# Altium PCB FOC_Driver.PcbDoc (part 1 of 2)
Units mil, origin at the board's own origin, x right, y up, seen from the top; angles counter-clockwise.
Board outline 3543.31 x 2362.2 mil, 4 copper layers (Top Layer 1, Ground, Power, Bottom Layer 1), stack 23.756 mil thick; 79 components, 64 nets, 313 pads, 178 vias.
Unrouted connection lines stored in the file: 65.
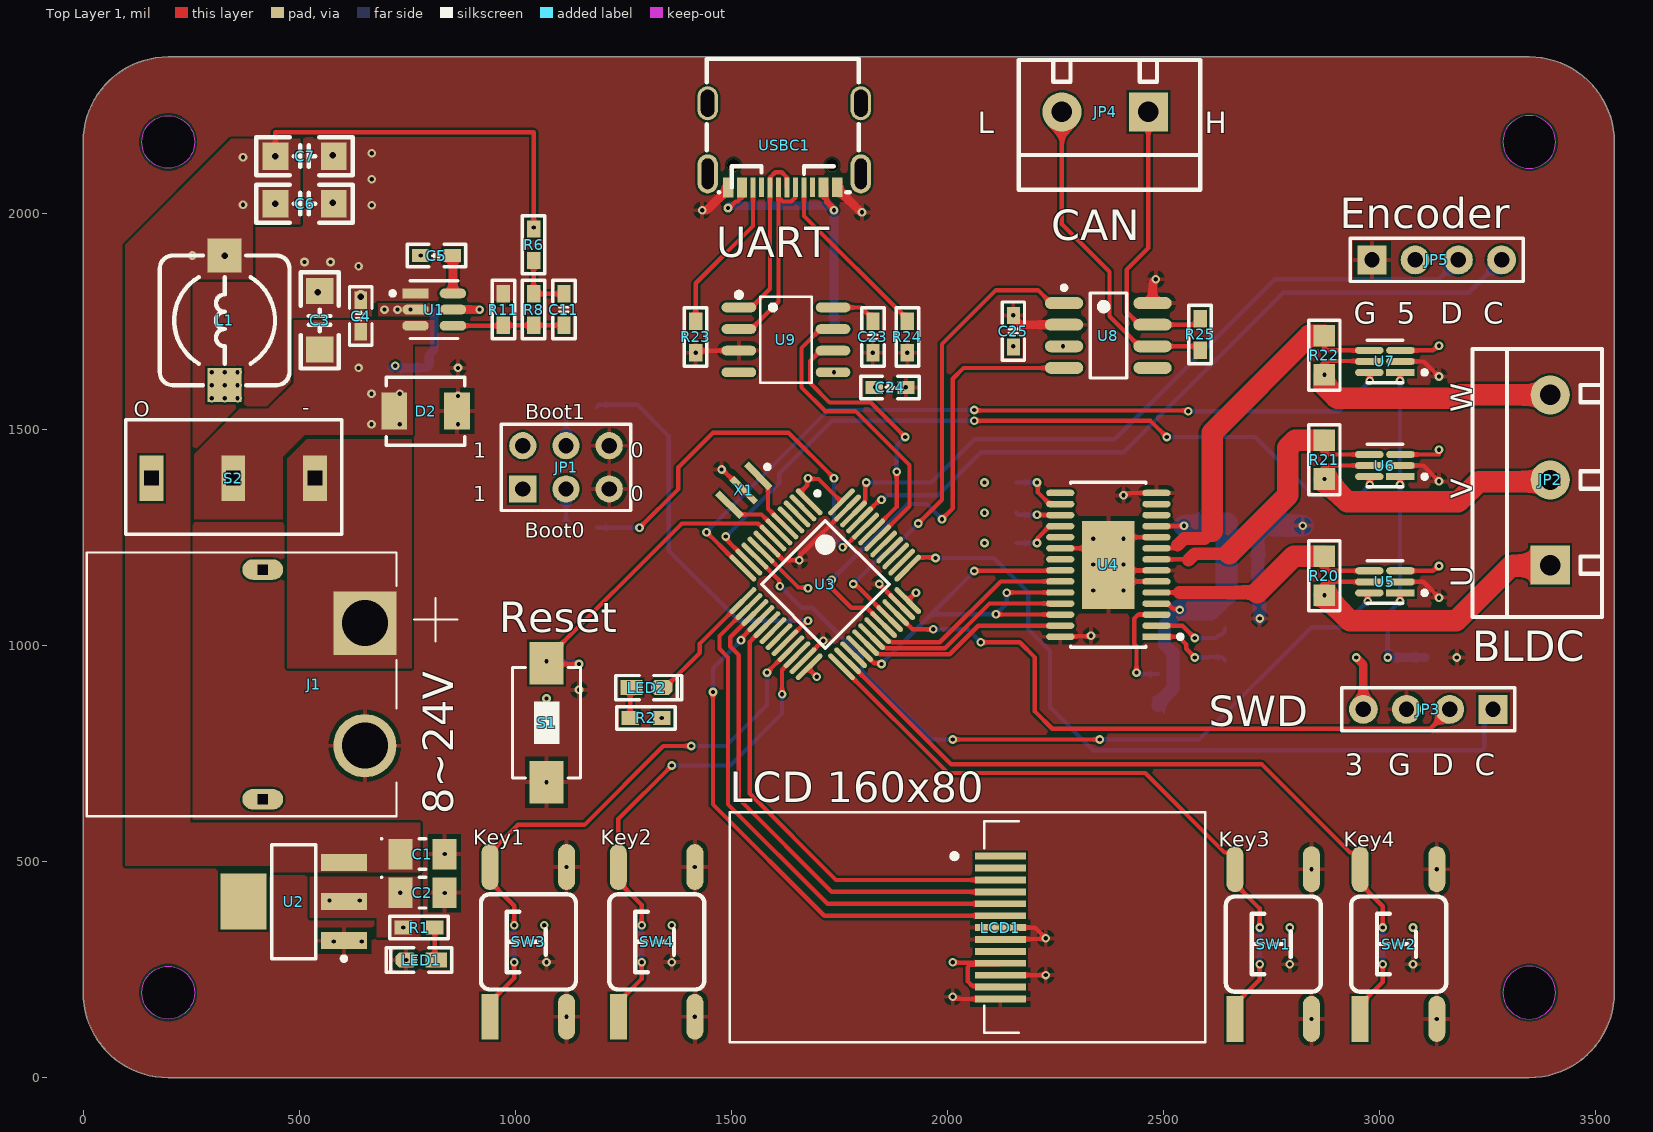
[diagram p0: Top Layer 1 view]
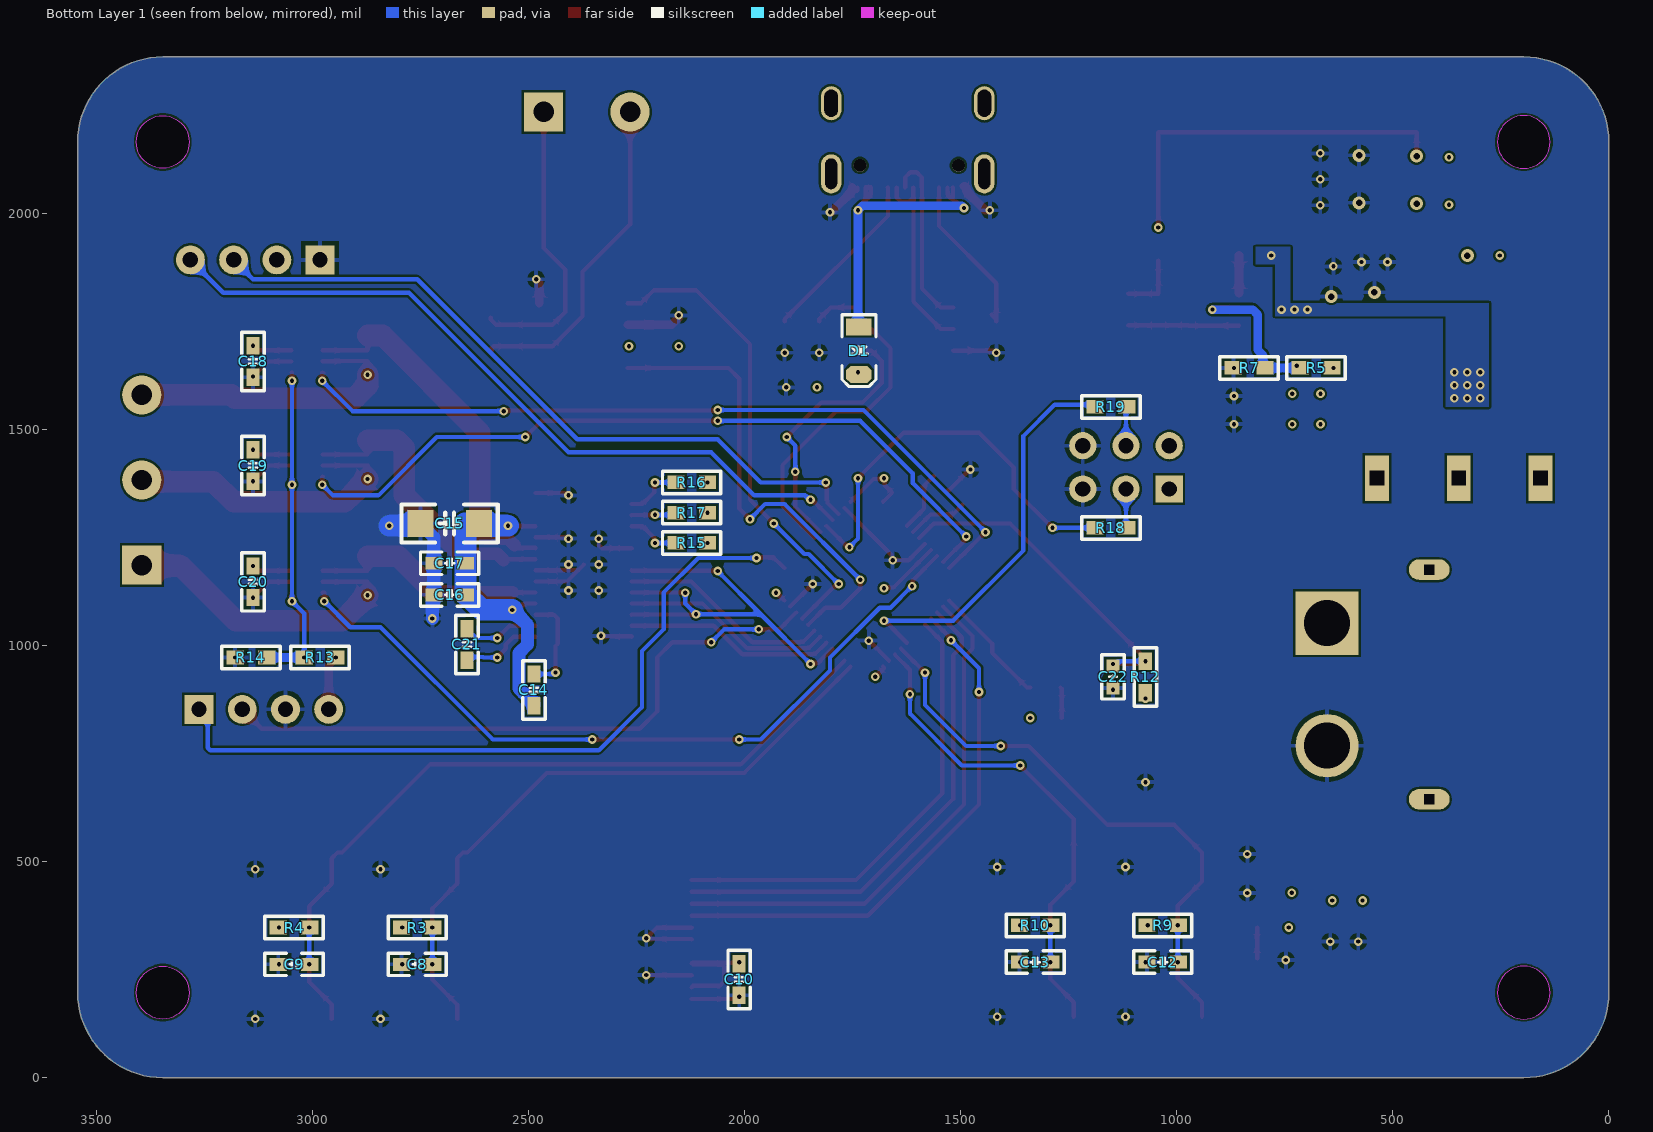
[diagram p1: Bottom Layer 1 view, seen from below]
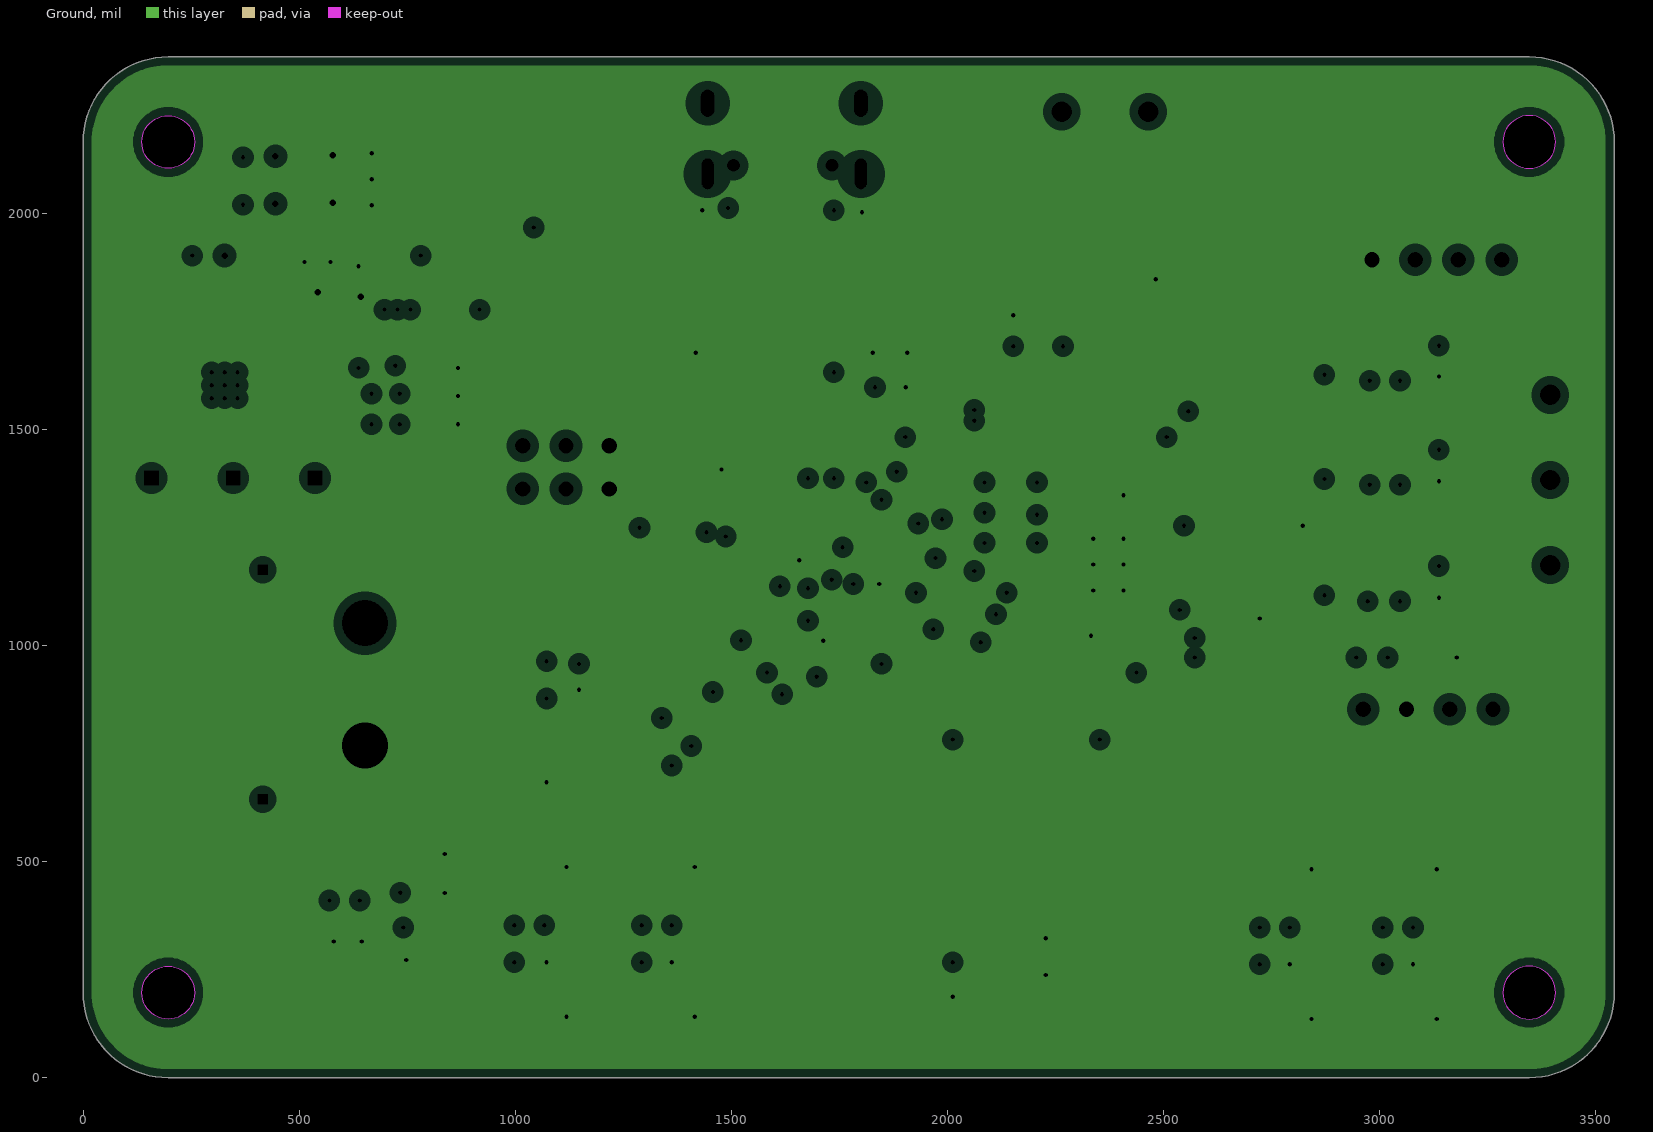
[diagram p2: Ground, clearances drawn from the general rule]
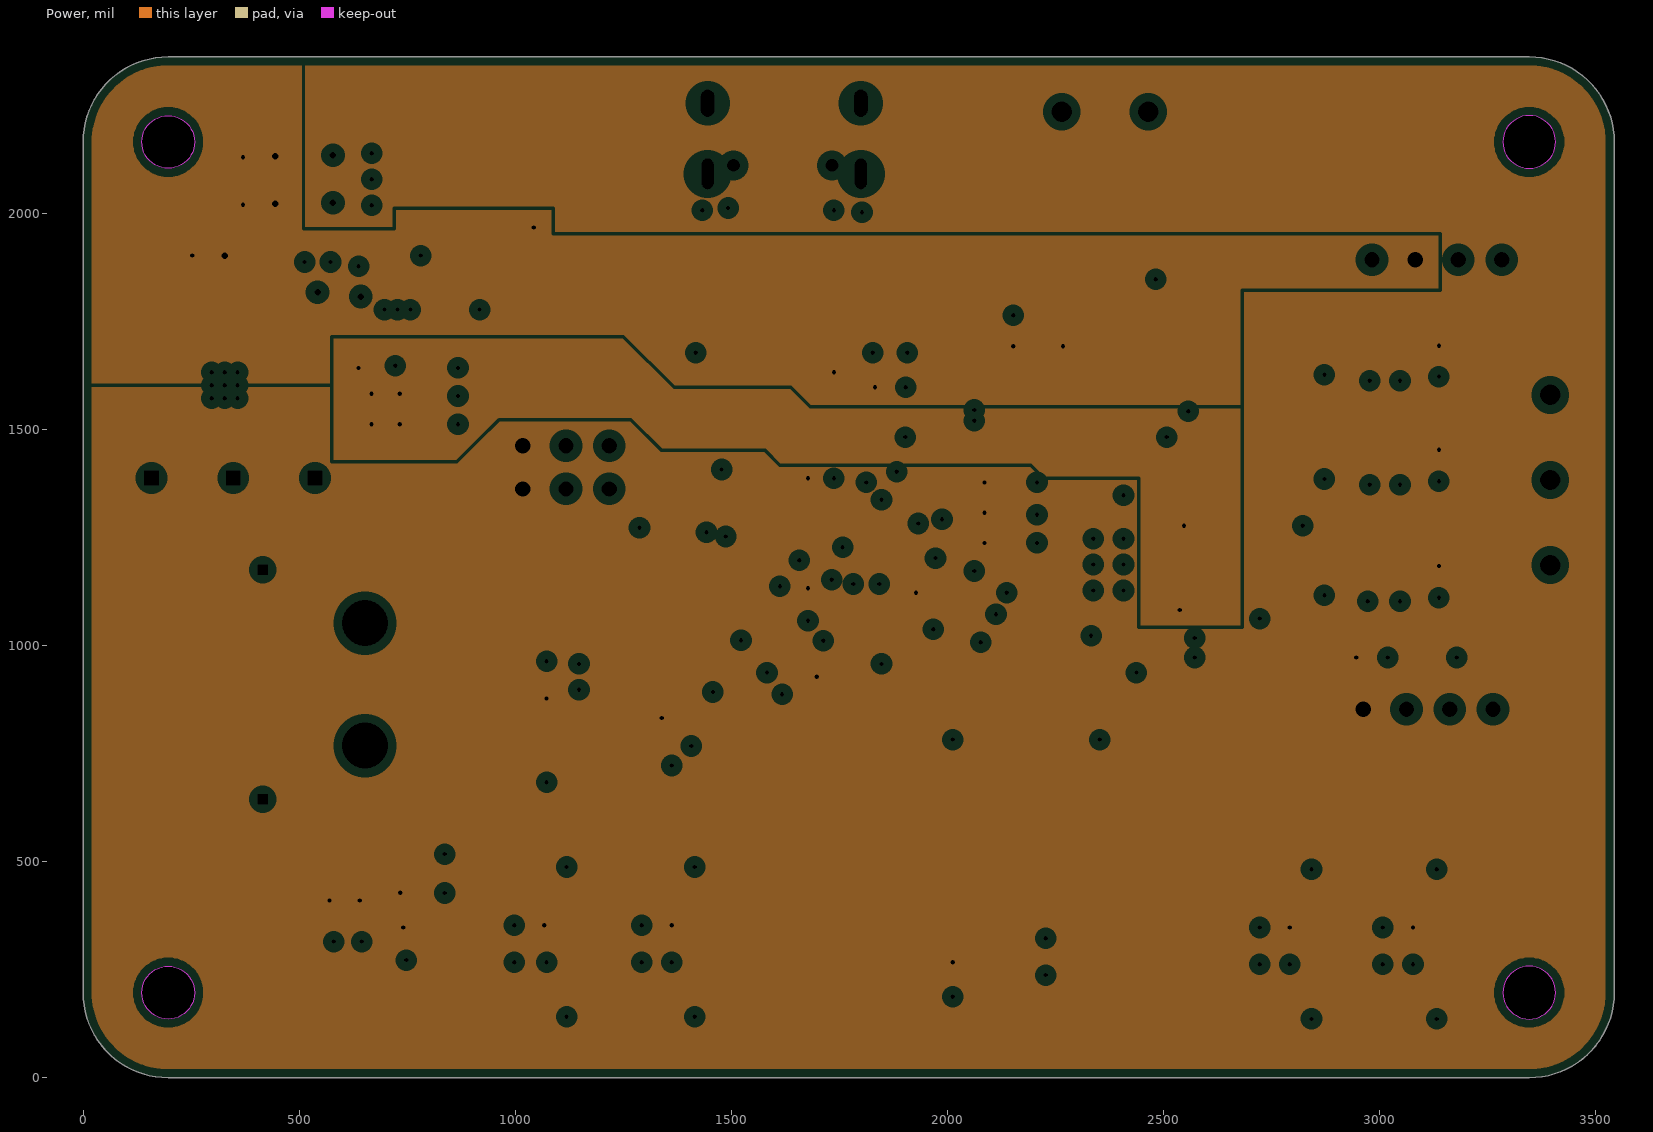
[diagram p3: Power, clearances drawn from the general rule]

## Layer stack, top to bottom
Top Solder: solder mask 0.4, Solder Resist, Dk 3.5
Top Layer 1: signal copper 1.378
Dielectric 2: prepreg 2.8, PP-006, Dk 4.1
Ground: plane copper 1.4, net GND
Dielectric 1: dielectric 12.6, FR-4, Dk 4.8
Power: plane copper 1.4, net +3V3
Dielectric 3: prepreg 2.8, PP-006, Dk 4.1
Bottom Layer 1: signal copper 1.378
Bottom Solder: solder mask 0.4, Solder Resist, Dk 3.5

## Board outline
196.85,0 cw(c196.85,196.85) 0,196.85 0,2165.35 cw(c196.85,2165.35) 196.85,2362.2 3346.46,2362.2 cw(c3346.46,2165.35) 3543.31,2165.35 3543.31,196.85 cw(c3346.46,196.85) 3346.46,0
cut-out: 196.85,2104.33 cw(c196.85,2165.35) 135.83,2165.35 cw(c196.85,2165.35) 196.85,2226.38 cw(c196.85,2165.35) 257.87,2165.35 cw(c196.85,2165.35)
cut-out: 3285.43,2165.35 ccw(c3346.46,2165.35) 3346.46,2104.33 ccw(c3346.46,2165.35) 3407.48,2165.35 ccw(c3346.46,2165.35) 3346.46,2226.38 ccw(c3346.46,2165.35)
cut-out: 3285.43,196.85 ccw(c3346.46,196.85) 3346.46,135.83 ccw(c3346.46,196.85) 3407.48,196.85 ccw(c3346.46,196.85) 3346.46,257.87 ccw(c3346.46,196.85)
cut-out: 196.85,135.83 cw(c196.85,196.85) 135.83,196.85 cw(c196.85,196.85) 196.85,257.87 cw(c196.85,196.85) 257.87,196.85 cw(c196.85,196.85)

## Design rules (kind name [scope] priority, off if disabled: settings)
Clearance [All] p1: gap=5 ignorepadtopadclearanceinfootprint=FALSE except(3: Arc-Arc Arc-Track Track-Track)
HoleSize [All] p1: absolutevalues=TRUE maxlimit=3937.01 minlimit=7.87 maxpercent=80.000 minpercent=20.000
MinimumSolderMaskSliver [All] p1: minsoldermaskwidth=0
PlaneClearance [All] p1: clearance=20
PlaneConnect [All] p1: planeconnectstyle=Relief reliefexpansion=20 reliefentries=4 reliefconductorwidth=10 reliefairgap=10
PolygonConnect PolygonConnect_13 [All vs IsNamedPolygon('Bottom Layer-GND')] p1: connectstyle=Relief reliefconductorwidth=10 reliefentries=4 polygonreliefangle="90 Angle" airgapwidth=10
PolygonConnect PolygonConnect_12 [All vs IsNamedPolygon('Top Layer-Power GND')] p2: connectstyle=Direct reliefconductorwidth=10 reliefentries=4 polygonreliefangle="90 Angle" airgapwidth=10
PolygonConnect PolygonConnect_11 [All vs IsNamedPolygon('Top Layer-Power GND')] p3: connectstyle=Direct reliefconductorwidth=10 reliefentries=4 polygonreliefangle="90 Angle" airgapwidth=10
PolygonConnect PolygonConnect_10 [All vs IsNamedPolygon('Top Layer-Power GND')] p4: connectstyle=Direct reliefconductorwidth=10 reliefentries=4 polygonreliefangle="90 Angle" airgapwidth=10
PolygonConnect PolygonConnect_9 [All vs IsNamedPolygon('Top Layer-GND')] p5: connectstyle=Relief reliefconductorwidth=10 reliefentries=4 polygonreliefangle="90 Angle" airgapwidth=10
PolygonConnect PolygonConnect_8 [All vs IsNamedPolygon('Top Layer-GND')] p6: connectstyle=Direct reliefconductorwidth=10 reliefentries=4 polygonreliefangle="90 Angle" airgapwidth=10
PolygonConnect PolygonConnect_7 [All vs IsNamedPolygon('Top Layer-VM_IN')] p7: connectstyle=Direct reliefconductorwidth=10 reliefentries=4 polygonreliefangle="90 Angle" airgapwidth=10
PolygonConnect PolygonConnect_6 [All vs IsNamedPolygon('Top Layer-SW')] p8: connectstyle=Direct reliefconductorwidth=10 reliefentries=4 polygonreliefangle="90 Angle" airgapwidth=10
PolygonConnect PolygonConnect_5 [All vs IsNamedPolygon('Bottom Layer-GND')] p9: connectstyle=Direct reliefconductorwidth=10 reliefentries=4 polygonreliefangle="90 Angle" airgapwidth=10
PolygonConnect PolygonConnect_4 [All vs IsNamedPolygon('Bottom Layer-SW')] p10: connectstyle=Direct reliefconductorwidth=10 reliefentries=4 polygonreliefangle="90 Angle" airgapwidth=10
PolygonConnect PolygonConnect_3 [All vs IsNamedPolygon('Top Layer-VM')] p11: connectstyle=Direct reliefconductorwidth=10 reliefentries=4 polygonreliefangle="90 Angle" airgapwidth=10
PolygonConnect PolygonConnect_2 [All vs IsNamedPolygon('Top Layer-3V3')] p12: connectstyle=Direct reliefconductorwidth=10 reliefentries=4 polygonreliefangle="90 Angle" airgapwidth=10
PolygonConnect PolygonConnect_1 [All vs IsNamedPolygon('Top Layer-5V')] p13: connectstyle=Direct reliefconductorwidth=10 reliefentries=4 polygonreliefangle="90 Angle" airgapwidth=10
PolygonConnect [All] p14: connectstyle=Relief reliefconductorwidth=10 reliefentries=4 polygonreliefangle="90 Angle" airgapwidth=10
RoutingVias [All] p1: holewidth=10 width=18 viastyle="Through Hole" minholewidth=7.87 minwidth=17.72 maxholewidth=28 maxwidth=50
SilkToSilkClearance [All] p1: silktosilkclearance=0
SilkToSolderMaskClearance [IsPad] p1: minsilkscreentomaskgap=0 clearancetoexposedcopper=TRUE
SolderMaskExpansion [All] p1: expansion=4 istentingtop=FALSE
UnRoutedNet [All] p1: checkbadconnections=TRUE
Width [All] p1: maxlimit=100 minlimit=3.5 preferedwidth=4
23 further rules are at their usual default settings.

## Components (designator, comment, footprint, x,y, rotation, side; value= is the part's Value field where it differs from the comment)
C1 "10uF" CAPMP3217X18-T_V 785.34,517.5 r0 top
C2 "10uF" CAPMP3217X18-T_V 785.34,428.22 r0 top
C3 "10uF" "C 1206_M" 547.5,1752.5 r270 top
C4 "0.1uF" "C 0603_M" 642.5,1762.5 r270 top
C5 "0.1uF" "C 0603_M" 817.5,1902.5 r180 top
C6 "22uF" "C 1206_M" 512.5,2022.5 r180 top
C7 "22uF" "C 1206_M" 512.5,2132.5 r180 top
C8 "0.1uF" "C 0603_M" 2757.5,262.5 r0 bottom
C9 "0.1uF" "C 0603_M" 3042.5,262.5 r0 bottom
C10 "0.1uF" "C 0603_M" 2012.5,227.5 r90 bottom
C11 "75pF" "C 0603_M" 1112.5,1777.5 r90 top
C12 "0.1uF" "C 0603_M" 1032.5,267.5 r0 bottom
C13 "0.1uF" "C 0603_M" 1327.5,267.5 r0 bottom
C14 "0.1uF 16V" "C 0603_M" 2487.5,897.5 r270 bottom
C15 "10uF" "C 1206_M" 2682.5,1282.5 r180 bottom
C16 "0.1uF" "C 0603_M" 2682.5,1117.5 r180 bottom
C17 "0.1uF" "C 0603_M" 2682.5,1190.5 r180 bottom
C18 "0.1uF" "C 0603_M" 3137.5,1657.5 r270 bottom
C19 "0.1uF" "C 0603_M" 3137.5,1416.5 r270 bottom
C20 "0.1uF" "C 0603_M" 3137.5,1147.5 r270 bottom
C21 "0.01uF 100V" "C 0603_M" 2642.5,1002.5 r90 bottom
C22 "0.1uF" "C 0603_L" 1147.5,927.5 r90 bottom
C23 "0.1uF" "C 0603_M" 1827.5,1714.23 r270 top
C24 "0.1uF" "C 0603_M" 1867.5,1597.5 r180 top
C25 "0.1uF" "C 0603_M" 2152.5,1727.5 r90 top
D1 "B5819WS" SOD-323 1735.43,1682.5 r270 bottom
D2 "SMBJ24CA-E3/52" VISH-DO-214AA-A-2_V 792.5,1542.5 r180 top
J1 "XT60PW-M" AMASS_XT60PW-M 415.81,910 r90 top
JP1 "BOOT" HDR2.54-LI-2x3P 1117.5,1412.5 r0 top
JP2 "HDR-1X3" KF301-5.0-3P 3395,1383.15 r90 top
JP3 "SWD" HDR2.54-LI-4P 3112.5,852.5 r180 top
JP4 "HDR-1X2" KF301-5.0-2P 2265,2235 r180 top
JP5 "HDR-1X4" HDR2.54-M-LI-4P 3132.5,1892.5 r0 top
L1 "15uH" CDRH73 327.5,1752.5 r90 top
LCD1 "IPS 0.96 LCD st7735 80x160" "IPS 0.96 LCD st7735 80x160" 1498.53,84.39 r0 top
LED1 "红色" "LED 0603R" 782.5,272.5 r180 top
LED2 "绿色" "LED 0603R" 1304,902.5 r0 top
R1 "1K" "R 0603_M" 777.5,347.5 r0 top
R2 "1K" "R 0603_M" 1302.5,832.5 r180 top
R3 "10K" "R 0603_M" 2757.5,347.5 r180 bottom
R4 "10K" "R 0603_M" 3042.5,347.5 r180 bottom
R5 "511K" "R 0603_M" 677.5,1642.5 r180 bottom
R6 "49.9R" "R 0603_M" 1042.5,1927.5 r90 top
R7 "105K" "R 0603_M" 832.5,1642.5 r180 bottom
R8 "100K" "R 0603_M" 1042.5,1777.5 r90 top
R9 "10K" "R 0603_M" 1032.5,352.5 r180 bottom
R10 "10K" "R 0603_M" 1327.5,352.5 r180 bottom
R11 "13.3K" "R 0603_M" 972.5,1777.5 r270 top
R12 "10K" "R 0603_M" 1072.5,927.5 r270 bottom
R13 "10K" "R 0603_M" 2982.5,972.5 r180 bottom
R14 "10K" "R 0603_M" 3142.5,972.5 r180 bottom
R15 "10K" "R 0603_M" 2122.5,1237.5 r180 bottom
R16 "10K" "R 0603_M" 2122.5,1377.5 r180 bottom
R17 "10K" "R 0603_M" 2122.5,1307.5 r180 bottom
R18 "10K" "R 0603_M" 1152.5,1272.5 r0 bottom
R19 "10K" "R 0603_M" 1152.5,1552.5 r180 bottom
R20 "0.01R" "R 0805_M" 2872.5,1161.5 r90 top
R21 "0.01R" "R 0805_M" 2872.5,1430.5 r90 top
R22 "0.01R" "R 0805_M" 2872.5,1671.5 r90 top
R23 "5.1K" "R 0603_M" 1417.5,1714.23 r90 top
R24 "5.1K" "R 0603_M" 1907.5,1714.23 r90 top
R25 "120R" "R 0603_M" 2585,1720 r90 top
S1 "SW-PB" SW_PB2_A1 1072.5,823.96 r180 top
S2 "SS12D10" SS12D10 158.52,1387.5 r0 top
SW1 "6x6x5" "TSW SMD-6*6*4.3" 2754.33,309.27 r90 top
SW2 "6x6x5" "TSW SMD-6*6*4.3" 3044.33,309.27 r90 top
SW3 "6x6x5" "TSW SMD-6*6*4.3" 1030.61,314.27 r90 top
SW4 "6x6x5" "TSW SMD-6*6*4.3" 1327.5,314.27 r90 top
U1 "TPS54202DDCR" FP-DDC0006A-IPC_B 812.5,1777.5 r0 top
U2 "LM1117IMPX-3.3/NOPB" MP04A_M 487.5,407.5 r180 top
U3 "STM32F103C8T6" STM-LQFP48_M 1717.5,1141.75 r315 top
U4 "DRV8313PWPR" FP-PWP0028C-IPC_B 2372.5,1186.75 r180 top
U5 "INA199A1DCKR" FP-DCK0006A-IPC_A 3012.5,1147.5 r180 top
U6 "INA199A1DCKR" FP-DCK0006A-IPC_A 3012.5,1416.5 r180 top
U7 "INA199A1DCKR" FP-DCK0006A-IPC_A 3012.5,1657.5 r180 top
U8 "TJA1050T/CM,118" NXP-SOT96-1_M 2372.5,1717.5 r0 top
U9 "CH340N" CH340N 1472.43,1822.52 r270 top
USBC1 "TYPE-C 2.0 -16P" USB-C-SMD_TYPE-C-USB-5 1622.5,2157.5 r180 top
X1 "CSTCE8M00G55-R0" MURA-CSTCE_G_A-3_V 1529.09,1359.09 r225 top

## Footprints (in the part's own frame and the unit in brackets; to place one, negate y for a bottom-side part, rotate by r counter-clockwise, add the part's x,y. Pads: shape width x height; smd on the part's side, far side on the other; paste and mask are expansions set on the pad)
AMASS_XT60PW-M [mm]
  rect 3.716x3.716 hole 2.7: 1(3.6,-6)
  round 3.716 hole 2.7: 2(-3.6,-6)
  oval 1.2x2.4 hole 0.6 square: S1(6.75,0) S2(-6.75,0)
  silkscreen extent -7.75,-11.43 7.75,10.35, body extent -7.75,-7.85 7.75,10.35, height 8.52
"C 0603_L" [mil] "无极性贴片电容                                       淘宝ID:黄晶宝石"
  rect 30x30 smd: 1(-25.59,0) 2(25.59,0)
  silkscreen extent -51,-26 51,26, body extent -31,-16 31,16, height 32
"C 0603_M" [mil] "无极性贴片电容                                淘宝ID:黄晶宝石"
  rect 40x30 smd: 1(-36.5,0) 2(36.5,0)
  silkscreen extent -68,-26 68,26, body extent -31,-16 31,16, height 32
"C 1206_M" [mil] "无极性贴片电容"
  rect 60x62.99 smd: 1(-67.5,0) 2(67.5,0)
  silkscreen extent -112,-44 112,44, body extent -63,-32 63,32, height 48
CAPMP3217X18-T_V [mm] "Molded Capacitor, 2-Leads, Body 3.40x1.8mm"
  rect 1.4x1.8 smd: 1(-1.3,0) 2(1.3,0)
  silkscreen extent -2.45,-0.9 0.2,0.95, body extent -1.92,-0.9 1.92,0.9, height 1.8
CDRH73 [mm] "7.3*7.3*3.4mm（长宽高）"
  rect 2x2 smd: 1(-3.81,0) 2(3.81,0)
  silkscreen extent -3.81,-3.81 3.81,3.81, body extent -3.65,-3.65 3.65,3.65, height 3.65
CH340N [mil]
  oval 22.6x80.14 smd: 1(40.02,45.07) 2(90.02,45.07) 3(140.02,45.07) 4(190.02,45.07) 5(190.02,263) 6(140.02,263) 7(90.02,263) 8(40.02,263)
  silkscreen extent 5,39 214,214
FP-DCK0006A-IPC_A [mm]
  rect 1.677x0.416 smd paste+0 mask+0: 1(-0.914,0.65)
  rrect100% 1.677x0.416 smd paste+0 mask+0: 2(-0.914,0) 3(-0.914,-0.65) 4(0.914,-0.65) 5(0.914,0) 6(0.914,0.65)
  silkscreen extent -2.45,-1.25 1.05,1.25
FP-DDC0006A-IPC_B [mm]
  rect 1.554x0.572 smd paste+0 mask+0: 1(-1.1,0.95)
  rrect100% 1.554x0.572 smd paste+0 mask+0: 2(-1.1,0) 3(-1.1,-0.95) 4(1.1,-0.95) 5(1.1,0) 6(1.1,0.95)
  silkscreen extent -2.57,-1.7 1.4,1.7, body extent -2.13,-1.7 2.13,1.7, height 0.25
FP-PWP0028C-IPC_B [mm]
  rect 1.655x0.381 smd paste+0 mask+0: 1(-2.825,4.225)
  rrect100% 1.655x0.381 smd paste+0 mask+0: 2(-2.825,3.575) 3(-2.825,2.925) 4(-2.825,2.275) 5(-2.825,1.625) 6(-2.825,0.975) 7(-2.825,0.325) 8(-2.825,-0.325) 9(-2.825,-0.975) 10(-2.825,-1.625) 11(-2.825,-2.275) 12(-2.825,-2.925) 13(-2.825,-3.575) 14(-2.825,-4.225) 15(2.825,-4.225) 16(2.825,-3.575) 17(2.825,-2.925) 18(2.825,-2.275) 19(2.825,-1.625) 20(2.825,-0.975) 21(2.825,-0.325) 22(2.825,0.325) 23(2.825,0.975) 24(2.825,1.625) 25(2.825,2.275) 26(2.825,2.925) 27(2.825,3.575) 28(2.825,4.225)
  rect 3.1x5.18 smd paste-1000 mask+0: 29(0,0)
  silkscreen extent -4.35,-4.85 2.2,4.85, body extent -3.9,-5.1 3.9,5.1, height 0.25
HDR2.54-LI-2x3P [mm] "封装库来自淘宝卖家 ID：黄晶宝石"
  rect 1.6x1.6 hole 0.9: 1(-2.54,-1.27)
  round 1.6 hole 0.9: 2(-2.54,1.27) 3(0,-1.27) 4(0,1.27) 5(2.54,-1.27) 6(2.54,1.27)
  silkscreen extent -3.81,-2.54 3.81,2.54, body extent -3.81,-2.54 3.81,2.54, height 8.5
HDR2.54-LI-4P [mm] "排针，4脚"
  rect 1.7x1.7 hole 0.9: 1(-3.81,0)
  round 1.7 hole 0.9: 2(-1.27,0) 3(1.27,0) 4(3.81,0)
  silkscreen extent -5.08,-1.27 5.08,1.27, body extent -5.08,-1.27 5.08,1.27, height 8.5
HDR2.54-M-LI-4P [mm] "排母，4脚  淘宝ID:黄晶宝石   店铺网址:https://shop463601444.taobao.com"
  rect 1.7x1.7 hole 0.9: 1(-3.81,0)
  round 1.7 hole 0.9: 2(-1.27,0) 3(1.27,0) 4(3.81,0)
  silkscreen extent -5.08,-1.27 5.08,1.27, body extent -5.08,-1.27 5.08,1.27, height 8.5
"IPS 0.96 LCD st7735 80x160" [mm]
  rect 3x0.4 smd: 1(15.849,10.88) 2(15.849,10.18) 3(15.849,9.48) 4(15.849,8.78) 5(15.849,8.08) 6(15.849,7.38) 7(15.849,6.68) 8(15.849,5.98) 9(15.849,5.28) 10(15.849,4.58) 11(15.849,3.88) 12(15.849,3.18) 13(15.849,2.48)
  silkscreen extent -0.05,-0.05 27.9,13.45
KF301-5.0-2P [mm] "可拼接端子/6A"
  rect 2.3x2.3 hole 1.2: 1(-5.08,0)
  round 2.3 hole 1.2: 2(0,0)
  silkscreen extent -8.13,-3.05 2.54,4.57, body extent -7.95,-3 2.55,4.6, height 10.05
KF301-5.0-3P [mm] "可拼接端子/6A"
  rect 2.3x2.3 hole 1.2: 1(-5,0)
  round 2.3 hole 1.2: 2(0,0) 3(5,0)
  silkscreen extent -8.05,-3.05 7.7,4.57, body extent -7.87,-3 7.63,4.6, height 10.05
"LED 0603R" [mil] "红色0603LED                                           淘宝ID:黄晶宝石"
  rect 50x35 smd: 1(-35,0.26)
  oct 50x35 smd: 2(35,0.26)
  silkscreen extent -71,-28 81,28, body extent -31,-16 31,16, height 18
MP04A_M [mm] "SOT223, 4-Leads, Body 6.5x3.5mm, Pitch 2.3mm, Lead Span 7mm, IPC Low Density"
  rect 2.7x1 smd: 1(-2.95,2.3) 2(-2.95,0) 3(-2.95,-2.3)
  rect 2.7x3.3 smd: 4(2.95,0)
  silkscreen extent -3.08,-3.35 1.3,3.47, body extent -1.86,-3.35 1.86,3.35, height 1.8
MURA-CSTCE_G_A-3_V [mm] "SMD, 3-Leads, Body 3.2x1.3mm, Pitch 1.2mm"
  rect 0.4x2 smd: 1(-1.2,0) 2(0,0) 3(1.2,0)
  silkscreen extent -2.07,-0.12 -1.83,0.12, body extent -1.6,-0.65 1.6,0.65, height 0.7
NXP-SOT96-1_M [mm] "SOIC, 8-Leads, Body 5x4mm, Pitch 1.27mm, IPC Low Density"
  oval 2.25x0.7 smd: 1(-2.6,1.905) 2(-2.6,0.635) 3(-2.6,-0.635) 4(-2.6,-1.905) 5(2.6,-1.905) 6(2.6,-0.635) 7(2.6,0.635) 8(2.6,1.905)
  silkscreen extent -2.72,-2.5 1.07,2.93, body extent -2,-2.5 2,2.5, height 1.75
"R 0603_M" [mil] "1/10W贴片电阻                             淘宝ID:黄晶宝石"
  rect 40x31.5 smd: 1(-36.5,0) 2(36.5,0)
  silkscreen extent -68,-26 68,26, body extent -31,-16 32,16, height 16
"R 0805_M" [mil] "1/8W贴片电阻"
  rect 50x50 smd: 1(-45,0) 2(45,0)
  silkscreen extent -81,-36 81,36, body extent -39,-25 39,25, height 20
SOD-323 [mm] "1.8x1.3X0.9mm（长宽高，不包括引脚）"
  rect 1x1.5 smd: 1(-1.4,0)
  oct 1x1.5 smd: 2(1.4,0)
  silkscreen extent -2.11,-1 2.1,1, body extent -1.34,-0.63 1.31,0.67, height 1
SS12D10 [mm]
  rect 1.406x2.681 hole 0.85 square: 1(0,0) 2(4.8,0) 3(9.6,0)
  silkscreen extent -1.52,-3.3 11.18,3.43
STM-LQFP48_M [mm] "QFP, 48-Leads, Body 7x7mm, Pitch 0.5mm, IPC Low Density"
  oval 2.1x0.3 smd: 1(-4.1,2.75) 2(-4.1,2.25) 3(-4.1,1.75) 4(-4.1,1.25) 5(-4.1,0.75) 6(-4.1,0.25) 7(-4.1,-0.25) 8(-4.1,-0.75) 9(-4.1,-1.25) 10(-4.1,-1.75) 11(-4.1,-2.25) 12(-4.1,-2.75) 25(4.1,-2.75) 26(4.1,-2.25) 27(4.1,-1.75) 28(4.1,-1.25) 29(4.1,-0.75) 30(4.1,-0.25) 31(4.1,0.25) 32(4.1,0.75) 33(4.1,1.25) 34(4.1,1.75) 35(4.1,2.25) 36(4.1,2.75)
  oval 0.3x2.1 smd: 13(-2.75,-4.1) 14(-2.25,-4.1) 15(-1.75,-4.1) 16(-1.25,-4.1) 17(-0.75,-4.1) 18(-0.25,-4.1) 19(0.25,-4.1) 20(0.75,-4.1) 21(1.25,-4.1) 22(1.75,-4.1) 23(2.25,-4.1) 24(2.75,-4.1) 37(2.75,4.1) 38(2.25,4.1) 39(1.75,4.1) 40(1.25,4.1) 41(0.75,4.1) 42(0.25,4.1) 43(-0.25,4.1) 44(-0.75,4.1) 45(-1.25,4.1) 46(-1.75,4.1) 47(-2.25,4.1) 48(-2.75,4.1)
  silkscreen extent -4.22,-2.65 2.65,3.57, body extent -3.5,-3.5 3.5,3.5, height 1.6
SW_PB2_A1 [mm]
  rect 2x2.5 smd: 1(0,3.556) 2(0,-3.444)
  silkscreen extent -2,-3.19 2,3.31, body extent -1.93,-3.94 1.92,3.95, height 2.5
"TSW SMD-6*6*4.3" [mm] "6*6*4.3mm"
  rect 2.7x1 smd: 1(-4.4,2.261)
  oval 2.7x1 smd: 2(-4.4,-2.239) 3(4.4,-2.239) 4(4.4,2.261)
  silkscreen extent -2.79,-2.79 2.79,2.79, body extent -4.5,-3 4.5,3, height 4.25
USB-C-SMD_TYPE-C-USB-5 [mm]
  oval 1.2x2 hole 0.8 slot 1.6 at 90 deg: 0(-4.5,-2.475) 0(4.5,-2.475)
  oval 1.2x2.3 hole 0.7 slot 1.8 at 90 deg: 0(-4.5,1.675) 0(4.5,1.675)
  rect 0.3x1.15 smd: A1(-3.263,2.473) A4(-2.462,2.471) A5(-1.162,2.475) A6(-0.162,2.475) A7(0.337,2.473) A9(2.638,2.475) A12(3.438,2.475) B1(3.138,2.475) B4(2.337,2.475) B5(1.838,2.475) B6(0.838,2.475) B7(-0.663,2.473) B9(-2.162,2.471) B12(-2.963,2.473)
  rect 0.3x1.148 smd: A8(-1.663,2.475) B8(1.337,2.475)
  round 0.75 hole 0.75 unplated: ""(-2.803,1.175) ""(2.978,1.175)
  silkscreen extent -4.38,-5.08 4.56,2.75, body extent -4.34,-5.14 4.6,2.76, height 3.25
VISH-DO-214AA-A-2_V [mm] "Molded Diode, 2-Leads, Body 4.57x3.94mm"
  rect 1.52x2.18 smd: 1(-1.84,0) 2(1.839,0)
  silkscreen extent -2.3,-2 2.3,2, body extent -2.5,-1.97 2.5,1.97, height 2.44

## Part data
C1 C2: library part CMP-1661-00004-1, "Standard Tantalum, 10 uF, +/- 10%, 16 V, -55 to 125 degC, 2-Pin SMD (1206), RoHS, Tape and Reel", Case\Package=SOT-26, Frequency="300 MHz", Max Operating Temperature="150 degC", Max Power Dissipation="300 mW", Min Operating Temperature="-55 degC", Package Quantity=3000, ComponentLink1Description="Manufacturer URL", ComponentLink1URL=http://www.avx.com/, ComponentLink2Description=Datasheet, ComponentLink2URL=http://datasheets.avx.com/TAJ.pdf, ComponentLink3Description="Package Specification", ComponentLink3URL=http://www.avx.com/download/software/literature/AVX-Footprint-Library.pdf, DatasheetVersion=Feb-16, Elements=2, Height="1.3 mm", hFE Min=60, Length="3.1 mm", Mount="Surface Mount", PackageDescription="2-Pin Surface Mount Device, Body 3.2 x 1.65 mm", PackageReference=CAPMP3217X18-T, Packaging="Tape and Reel", Pins=6, Radiation Hardening=No, REACH SVHC="No SVHC", RoHSCompliant=true, Vce Max="500 mV", Width="1.7 mm"
C3 C4 C5 C6 C7 C8 C9 C10 C11 C12 C13 C14 C15 C16 C17 C18 C19 C20 C21 C22 C23 C24 C25: library part C, "贴片电容", BOM名称=无极性贴片电容, 唯一出售店铺网址=https://shop463601444.taobao.com, 淘宝ID="封装库来自淘宝 ID：黄晶宝石", 联系售后，技术支持=https://shop463601444.taobao.com
D1: library part 1N5819, "肖特基二极管", BOM名称=肖特基二极管, 属性=40V/2A, 欢迎光临=https://shop463601444.taobao.com, 淘宝ID="封装库来自淘宝 ID：黄晶宝石"
D2: library part CMP-2000-07094-1, "TRANSZORB(R) Transient Voltage Suppressor, 24 V, -55 to 150 degC, 2-Pin DO-214AA (SMBJ), RoHS, Tape and Reel", Breakdown Voltage Max=29.5V, Breakdown Voltage Min=26.7V, Clamping Voltage Vc Max=38.9V, Diode Case Style=DO-214AA, Manufacturer=Vishay, Package Description="2-Pin Surface Mount Device, Body 4.315 x 3.62 mm", Peak Pulse Current Ippm=14A, Peak Pulse Power Dissipation=600W, Reverse Stand-Off Voltage Vrwm=24V, Datasheet URL=http://www.vishay.com/docs/88392/smbj50a.pdf, Datasheet Version=02/2014, Manufacturer URL=http://www.vishay.com/, Mounting Technology=SurfaceMount, No. of Pins=2Pins, Package Reference=DO-214AA, Packaging=CutTape, Power Dissipation Pd=600W, Product Range=TRANSZORBSMBJSeries, SVHC=ToBeAdvised, TVS Polarity=Bidirectional
J1: "Socket, DC supply, male, PIN: 2", Package=Package, Availability="Not in stock", Check_prices=https://www.snapeda.com/parts/XT60PW-M/AMASS/view-part/?ref=eda, MF=AMASS, MP=XT60PW-M, Price=None, SnapEDA_Link=https://www.snapeda.com/parts/XT60PW-M/AMASS/view-part/?ref=snap
JP1: library part "Header 3X2", "3*2P接插件", BOM名称=3*2P接插件, 学习资源=https://shop463601444.taobao.com, 版权归属="封装库来自淘宝 ID：黄晶宝石"
JP2: library part "Header 3", "3P接插件", BOM名称=3P接插件, 学习资源=https://shop463601444.taobao.com, 版权归属="封装库来自淘宝 ID：黄晶宝石"
JP3 JP5: library part "Header 4", "4P接插件", BOM名称=4P接插件, 学习资源=https://shop463601444.taobao.com, 版权归属="封装库来自淘宝 ID：黄晶宝石"
JP4: library part "Header 2", "2P接插件", BOM名称=2P接插件, 技术支持，联系售后=https://shop463601444.taobao.com, 版权归属="封装库来自淘宝 ID：黄晶宝石"
L1: library part L-CDRH, "功率屏蔽电感", BOM名称=功率屏蔽电感, 版权归属="封装库来自淘宝 ID：黄晶宝石", 联系售后=https://shop463601444.taobao.com
LCD1: "中景园全彩IPS SPI接口 160x80 LCD显示屏"
LED1 LED2: library part LED-SMD, "贴片LED", BOM名称=贴片LED, 学习资源=https://shop463601444.taobao.com, 版权归属="封装库来自淘宝 ID：黄晶宝石"
R1 R2 R3 R4 R5 R6 R7 R8 R9 R10 R11 R12 R13 R14 R15 R16 R17 R18 R19 R20 R21 R22 R23 R24 R25: library part R, "贴片电阻", BOM名称=贴片电阻, 封装库来自淘宝卖家 ID：黄晶宝石=其他店铺购入均为盗版，不享受售后技术支持服务，请立即申请退款, 版权归属="来自淘宝 ID：黄晶宝石", 联系售后=https://shop463601444.taobao.com
S1: "微动开关", LatestRevisionDate=17-Jul-2002, LatestRevisionNote="Re-released for DXP Platform.", PackageReference=SPST-2, Published=24-Mar-1999, Publisher="Altium Limited"
S2: "大电流拨动开关 直脚"
SW1 SW2 SW3 SW4: library part "TSW SMD-6x6", "贴片6x6轻触开关", BOM名称=贴片6x6轻触开关, 唯一出售店铺网址=https://shop463601444.taobao.com, 版权归属="封装库来自淘宝 ID：黄晶宝石"
U1: library part CMP-04918-000439-1, "IC REG BUCK ADJ 2A TSOT23-6", Case/Package=SOT-23-6, Max Input Voltage=28V, Max Operating Temperature=125°C, Min Input Voltage=4.5V, Min Operating Temperature=-40°C, Min Output Voltage=596mV, Output Current=2A, Quiescent Current=40uA, Switching Frequency=500kHz, Lead Free="Lead Free", Max Output Voltage=28V, Mount="Surface Mount", Number of Outputs=1, Output Configuration=Positive, Output Type=Adjustable, Packaging="Tape and Reel", RoHS Compliant=Yes, Synchronous Rectifier=Yes
U2: library part CMP-0062-01632-3, "800mA Low-Dropout Linear Regulator, 4-pin SOT-223, Pb-Free", Manufacturer="National Semiconductor", PackageTopMarking=XYTT*N05B, PowerWise=N, Code_IPC=SOT223-4, Code_JEDEC=TO-261-AA, ComponentLink1Description="Manufacturer URL", ComponentLink1URL=http://www.national.com/, ComponentLink2Description="LM1117 Datasheet", ComponentLink2URL=http://www.national.com/ds/LM/LM1117.pdf, ComponentLink3Description="LM1117 Web Page", ComponentLink3URL=http://www.national.com/pf/LM/LM1117.html, ComponentLink4Description="MP04A Package Page", ComponentLink4URL=http://www.national.com/packaging/folders/mp04a.html, CompType="LDO IC", DatasheetVersion=Apr-2006, High-Reliability=Y, PackageDescription="Molded SOT-223, 6.50 x 3.56 x 1.6mm Body, 4 Lead, 2.3mm Pitch", PackageReference=MP04A, PackageVersion="revB, Apr-2003", PartNumber=LM1117IMPX-3.3/NOPB, PinCount=4, RevisionNote="SCH symbol layout adjusted", RoHS=Y
U3: library part CMP-0237-00215-3, "ARM Cortex-M3 32-bit MCU, 64 KB Flash, 20 KB Internal RAM, 37 I/Os, 48-pin LQFP, -40 to 85 degC, Tray", I/Os (High Current)=37, Operating Frequency(F) (Processor speed) (MHz)=72, Supply Voltage(Vcc) min (V)=2, A/D Converter="2x12-bit (10 Channel)", ComponentLink1Description="Manufacturer URL", ComponentLink1URL=http://www.st.com/web/en/home.html, ComponentLink2Description=Datasheet, ComponentLink2URL=http://www.st.com/st-web-ui/static/active/en/resource/technical/document/datasheet/CD00161566.pdf, ComponentLink3Description="Package Specification", ComponentLink3URL=http://www.st.com/st-web-ui/static/active/en/resource/technical/document/datasheet/DM00058181.pdf, Core="ARM Cortex-M3", DatasheetVersion="Rev. 16", FLASH Size (Prog) (kB)=64, Internal RAM Size (kB)=20, Mounting Technology="Surface Mount", PackageDescription="48-Pin Low Profile Quad Flat Package, 7 x 7 mm Body, 0.5 mm Pitch", PackageReference=LQFP48, PackageVersion="Rev. 6, 06/2013", Packing=Tray, PartNumber=STM32F103C8T6
U4: library part CMP-04915-000025-1, "IC MOTOR DRIVER 8V-60V 28HTSSOP", Case/Package=HTSSOP, Max Operating Temperature=125°C, Max Supply Voltage=60V, Min Operating Temperature=-40°C, Min Supply Voltage=8V, Output Current=1.75A, Package Quantity=2000, Interface=Parallel, Lead Free="Lead Free", Logic Function="AND GATE", Mount="Surface Mount", Number of Outputs=1, Number of Pins=28, Packaging="Tape and Reel", Series=-
U5 U6 U7: library part CMP-0704-00049-3, "IC OPAMP CURR SENSE 14KHZ SC70-6"
U8: library part CMP-2000-04923-1, "High speed CAN transceiver, 4.75 to 5.25 V, -40 to 150 degC, 8-Pin SO (SOT96-1), RoHS, Tape and Reel", Manufacturer="NXP Semiconductors", Package / Case="8-SOIC(0.154\",3.90mmWidth)", Package Description="8-Pin Small Outline Integrated Circuit, Body 4.9 x 3.9 mm, Pitch 1.27 mm", Package Reference=SOT96-1, Standard Package=1, Supplier Device Package=8-SO, Voltage - Supply=4.75V~5.25V, <PCN>=http://media.digikey.com/pdf/PCNs/NXP/201209019F04_TJA1050_Obs.pdf, Category=IntegratedCircuits(ICs), Datasheet URL=http://www.nxp.com/documents/data_sheet/TJA1050.pdf, Datasheet Version="Rev. 4, 10/2003", Duplex=Half, Dynamic Catalog=CANTransceivers, Family=Interface-Drivers,Receivers,Transceivers, Manufacturer URL=http://www.nxp.com/, Minimum Quantity=Transceiver, Mounting Type=SurfaceMount, Number of Drivers/Receivers=1/1, Other Names=568-10292-1, Package/Case="8-SOIC(0.154\",3.90mmWidth)", Packaging=CutTape(CT), PCN Obsolescence="TJA105028/Apr/2013 /  / MultipleDevices19/Apr/2013", PCN Packaging=LighterPackingReels30/Mar/2014, Product Training Modules=CANandLINBusTransceiver, Protocol=CAN, Quantity Available=CutTape(CT)AlternatePackaging, Receiver Hysteresis=70mV, Type=Transceiver
USBC1: library part "USB2.0 Type-C 16Pin母座", "USB2.0 Type-C 母座 16Pin", BOM_Manufacturer=LCSC, BOM_Manufacturer Part=-, BOM_Supplier=LCSC, spicePre=U, spiceSymbolName="TYPE-C 3.1 -16P_C168689"
X1: library part CMP-2100-03620-1, "Ceramic Resonator, 8 MHz, +/- 0.5%, -20 to 80 degC, 3-Pin SMD, RoHS, Tape and Reel", Capacitance=33pF, Case/Package=Ceramic, Frequency=8MHz, Frequency Stability=0.2%, Frequency Tolerance=0.5%, Manufacturer=Murata, Max Operating Temperature=80degC, Min Operating Temperature=-20degC, Package Description="3-Pin Surface Mount Device, Body 3.2 x 1.3 mm, Pitch 1.2 mm", Package Quantity=1, Package Reference=CSTCE_G_A-3, Composition=Ceramic, Contact Plating=Gold, Datasheet URL=http://www.murata.com/~/media/webrenewal/support/library/catalog/products/timingdevice/ceralock/p16e.ashx, Datasheet Version=42339.0, Height=0.031inch, Lead Free=LeadFree, Length=0.126inch, Load Capacitance=33pF, Manufacturer URL=http://www.murata.com/, Mount=SurfaceMount, Number of Pins=3, Packaging=TapeandReel, REACH SVHC=NoSVHC, RoHSCompliant=True, Self Resonant Frequency=8MHz, Termination=SMD/SMT, Tolerance=0.5%, Width=0.051inch

## Via types
v1: diameter 20, hole 10, Top Layer 1 to Bottom Layer 1, 171 vias
v2: diameter 30, hole 15, Top Layer 1 to Bottom Layer 1, 7 vias

## Nets (pads, with @x,y where several pads share a name; then routed paths per layer and width w, separated by ;. In a path a pad name is that pad's centre, name@x,y a point inside that pad or via, vN(x,y) a via of type N, cw(c..) or ccw(c..) an arc to the next point about the centre after c; other vN are vias at no path point)
+1.65V: R13.1 R14.2 U5.1 U6.1 U7.1 | length 797.2
  Top Layer 1 w10: v1(3047.5,1102.5) 3047.5,1120.94 U5.1 ; v1(3047.5,1372.5) 3047.5,1389.94 U6.1 ; v1(3047.5,1612.5) 3047.5,1630.94 U7.1
  Bottom Layer 1 w10: v1(3019,972.5) 3019,1074 v1(3047.5,1102.5) v1(3047.5,1612.5)
  Bottom Layer 1 w20: v1(3019,972.5) R14.2
+3V3: C2.1 C10.2 C18.1 C19.1 C20.1 JP1.1 JP1.2 JP3.4 LCD1.10 LCD1.12 R1.1 R2.1 R3.1 R4.1 R9.1 R10.1 R12.2 R13.2 R15.2 R16.2 R17.2 U2.2 U3.1 U3.9 U3.24 U3.36 U3.48 U5.3 U6.3 U7.3 | length 1094.6
  Top Layer 1 w10: U3.9 1655.24,1134.41 1675.59,1134.41 v1(1677.5,1132.5) ; U3.24 1677.52,948.66 1677.52,947.48 v1(1697.5,927.5) ; U3.1 1658.99,1353.38 1658.99,1354.56 1675.59,1371.16 1675.59,1385.59 v1(1677.5,1387.5) 1679.41,1385.59 1701.94,1385.59 U3.48 ; U3.36 1926.53,1122.5 v1(1927.5,1122.5) ; v1(2012.5,267.5) 2013.9,266.1 2121.1,266.1 LCD1.10 2119.63,261.83 2053.36,261.83 2047.5,255.97 2047.5,222.5 2057.54,212.46 2119.63,212.46 LCD1.12 ; U5.3 3123.88,1173.09 3134.79,1184 v1(3137.5,1184) ; U6.3 3137.5,1442.09 v1(3137.5,1453) ; U7.3 3123.88,1683.09 3134.79,1694 v1(3137.5,1694)
  Top Layer 1 w20: v1(2946,972.5) 2962.5,956 JP3.4
  other v1: 741,347.5 2792.5,347.5 3077.5,347.5 1067.5,352.5 1362.5,352.5 570,410 640,410 734.16,428.22 1339,832.5 1072.5,877.5 2086,1237.5 2086,1307.5 2086,1377.5
+5: C1.1 C6.2 C7.2 C24.2 C25.1 D1.2 JP5.2 L1.2 R6.2 U2.3 U8.3 U9.5 | length 876
  Top Layer 1 w10: v2(445,2132.5) 445,2187.5 1042.5,2187.5 v1(1042.5,1967.5) R6.2
  other v1: 1832.5,1597.5 1737.5,1632.5 2152.5,1692.5 2267.5,1692.5 252.5,1902.5 370,2020 370,2130
  other v2: 327.5,1902.5 445,2022.5
BOOT0: R18.2 U3.44 | length 954.4
  Top Layer 1 w10: v1(1287.5,1272.5) 1377.5,1362.5 1377.5,1412.5 1457.5,1492.5 1632.5,1492.5 v1(1737.5,1387.5) ; v1(1757.5,1227.5) 1759.41,1229.41 1763.4,1229.41 U3.44
  Bottom Layer 1 w10: R18.2 v1(1287.5,1272.5) ; v1(1737.5,1387.5) 1737.5,1247.5 v1(1757.5,1227.5)
BOOT1: R19.1 U3.20 | length 927.2
  Top Layer 1 w10: U3.20 1624.73,1006.73 1675.5,1057.5 v1(1677.5,1057.5)
  Bottom Layer 1 w10: R19.1 1194,1557.5 1282.5,1557.5 1355,1485 1355,1220 1517.5,1057.5 v1(1677.5,1057.5)
CAN_RX: U3.32 U8.4 | length 1120.1
  Top Layer 1 w10: v1(1732.5,1152.5) 1732.5,1132.5 1777.5,1087.5 1813.51,1087.5 U3.32 ; v1(1987.5,1292.5) 2012.5,1317.5 2012.5,1617.5 2037.5,1642.5 U8.4
  Bottom Layer 1 w10: v1(1732.5,1152.5) 1907.5,1327.5 1952.5,1327.5 v1(1987.5,1292.5)
CAN_TX: U3.33 U8.1 | length 1109.7
  Top Layer 1 w10: v1(1782.5,1142.5) 1784.41,1140.59 1788.26,1140.59 U3.33 ; v1(1932.5,1282.5) 1987.5,1337.5 1987.5,1697.5 2112.5,1822.5 2209.63,1822.5 2239.63,1792.5 U8.1
  Bottom Layer 1 w10: v1(1782.5,1142.5) 1851.82,1211.82 1861.82,1211.82 v1(1932.5,1282.5)
CANH: JP4.1 R25.2 U8.7 | length 677.8
  Top Layer 1 w10: JP4.1 2465,1920 2415,1870 2415,1771.85 2444.35,1742.5 U8.7 2575.25,1742.5 2587.5,1754.75 R25.2@2587.5,1759
CANL: JP4.2 R25.1 U8.6 | length 766.9
  Top Layer 1 w10: JP4.2 2265,1975 2375,1865 2375,1761.85 2444.35,1692.5 2581,1692.5 R25.1@2587.5,1686 ; R25.1 R25.1@2585,1687.75
CS1: U3.10 U5.6 | length 1776
  Top Layer 1 w10: U3.10 1610.59,1151.23 1610.59,1139.41 v1(1612.5,1137.5) ; v1(2012.5,782.5) v1(2352.5,782.5) ; v1(2972.5,1102.5) 2972.5,1121.91 U5.6 U5.6@2975.31,1120.69
  Bottom Layer 1 w10: v1(1612.5,1137.5) 1662.5,1087.5 1687.5,1087.5 1802.5,972.5 1802.5,942.5 1962.5,782.5 v1(2012.5,782.5) ; v1(2352.5,782.5) 2582.5,782.5 2842.5,1042.5 2912.5,1042.5 v1(2972.5,1102.5)
CS2: U3.11 U6.6 | length 1798.6
  Top Layer 1 w10: v1@1487.5,1249.79 v1(1487.5,1252.5) 1489.41,1250.59 1489.41,1244.56 U3.11 ; v1(2062.5,1520) 2470,1520 v1(2507.5,1482.5) ; U6.6 2977.5,1389.94 v1(2977.5,1372.5)
  Bottom Layer 1 w10: v1(1487.5,1252.5) 1610.96,1375.96 1610.96,1398.46 1732.5,1520 v1(2062.5,1520) ; v1(2507.5,1482.5) 2712.5,1482.5 2847.5,1347.5 2952.5,1347.5 v1(2977.5,1372.5)
CS3: U3.12 U7.6 | length 1822.3
  Top Layer 1 w10: v1(1442.5,1262.5) 1499.71,1205.29 1500.35,1205.29 1526.31,1179.33 U3.12 ; v1(2062.5,1545) 2063.75,1543.75 2556.25,1543.75 v1(2557.5,1542.5) ; U7.6@2975.31,1630.69 U7.6 2977.5,1630.94 v1(2977.5,1612.5)
  Bottom Layer 1 w10: v1(1442.5,1262.5) 1725,1545 v1(2062.5,1545) ; v1(2557.5,1542.5) 2907.5,1542.5 v1(2977.5,1612.5)
D+: U9.1 USBC1.A6 USBC1.B6 | length 419.7
  Top Layer 1 w10: U9.1 1546.27,1782.5 1589.53,1825.76 USBC1.B6 1590.43,2060.97 1590.43,2084.03 1601.56,2095.16 1616.87,2095.16 1627.99,2084.04 1627.99,2060.97 USBC1.A6
D-: U9.2 USBC1.A7 USBC1.B7 | length 475.9
  Top Layer 1 w10: U9.2 1546.27,1732.5 1609.21,1795.44 USBC1.A7 1610.12,2059.21 1610.12,2036.15 1618.85,2027.42 1638.94,2027.42 1647.68,2036.16 1647.68,2059.21 USBC1.B7
EN: U3.28 U4.22 U4.24 U4.26 | length 1052.1
  Top Layer 1 w10: U3.28 1797.33,992.81 1830.73,959.41 1845.59,959.41 v1(1847.5,957.5) ; v1(2062.5,1172.5) 2063.23,1173.23 2260.54,1173.23 U4.22 ; v1(2112.5,1072.5) 2112.95,1072.05 2260.81,1072.05 U4.26 ; v1(2137.5,1122.5) 2137.64,1122.64 2261.13,1122.64 U4.24
  Bottom Layer 1 w10: v1(1847.5,957.5) 1962.5,1072.5 ; v1(2062.5,1172.5) 1962.5,1072.5 ; v1(2137.5,1122.5) 2137.5,1097.5 v1(2112.5,1072.5) 1962.5,1072.5
Encoder_SCL: JP5.4 U3.45 | length 1734.9
  Top Layer 1 w10: U3.45 1841.74,1335.59 1845.59,1335.59 v1(1847.5,1337.5)
  Bottom Layer 1 w10: v1(1847.5,1337.5) 1850.21,1337.5 1860.21,1347.5 1977.5,1347.5 2077.5,1447.5 2407.5,1447.5 2776.62,1816.62 3206.62,1816.62 JP5.4
Encoder_SDA: JP5.3 U3.46 | length 1668.5
  Top Layer 1 w10: U3.46 1808.32,1330.01 1808.32,1335.36 1809.96,1337 1809.96,1372.26 1812.5,1374.79 v1(1812.5,1377.5)
  Bottom Layer 1 w10: v1(1812.5,1377.5) 1962.5,1377.5 2062.5,1477.5 2387.5,1477.5 2757.5,1847.5 3137.5,1847.5 JP5.3
GND: C1.2 C2.2 C3.1 C4.1 C6.1 C7.1 C8.2 C9.2 C10.1 C12.2 C13.2 C15.1 C16.1 C17.1 C18.2 C19.2 C20.2 C22.1 C23.2 C24.1 C25.2 D2.1 J1.2 JP1.5 JP1.6 JP3.3 JP5.1 LCD1.7 LCD1.8 LCD1.11 LCD1.13 LED1.2 R7.1 R11.1 R14.1 R23.1 R24.1 S1.1 SW1.2 SW1.3 SW2.2 SW2.3 SW3.2 SW3.3 SW4.2 SW4.3 U1.1 U2.1 U3.8 U3.23 U3.35 U3.47 U4.6 U4.7 U4.10 U4.14 U4.20 U4.28 U4.29 U5.2 U6.2 U7.2 U8.2 U8.8 U9.3 USBC1.A1 USBC1.A12 USBC1.B1 USBC1.B12 X1.2 | length 2533.1
  Top Layer 1 w10: v1(1417.5,1677.73) 1422.27,1682.5 U9.3 ; v1(1477.5,1407.5) 1479.09,1407.5 1527.5,1359.09 X1.2 ; U3.8 1582.97,1235.01 1620.48,1197.5 v1(1657.5,1197.5) 1659.41,1199.41 1659.41,1208.94 U3.47 ; U3.23 v1(1712.5,1011.48) v1@1712.5,1012.5 ; USBC1.B12 1739.13,2053.39 1740.04,2052.48 1750.04,2052.48 USBC1.A1@1750.94,2051.58 ; v1(1842.5,1142.5) 1894.28,1090.72 U3.35 ; v1(2012.5,187.5) 2015.21,187.5 2020.68,182.03 LCD1.13 ; LCD1.11 2122.68,237.32 2227.32,237.32 v1(2227.5,237.5) ; LCD1.8 2123.84,321.16 2226.16,321.16 v1(2227.5,322.5) 2202.62,347.38 LCD1.7 ; U4.28 2262.22,1021.37 2331.37,1021.37 v1(2332.5,1022.5) ; U4.20 2330.14,1225.14 U4.29@2337.5,1232.5 ; U4.29 U4.29@2385.3,1173.96 ; v1(2407.5,1247.5) 2410.73,1250.73 U4.10 ; v1(2407.5,1347.5) 2410.21,1347.5 2415.8,1353.09 U4.14 ; U4.6 2410.89,1148.37 U4.29@2385.3,1173.96 ; U4.7 U4.29@2385.3,1173.96 ; U5.2 3101,1147.5 v1(3137.5,1111) ; U6.2 3101,1416.5 v1(3137.5,1380) ; U7.2 3102.5,1657.5 v1(3137.5,1622.5)
  Top Layer 1 w20: v1(1432.5,2007.5) 1443.15,2007.5 USBC1.A12@1487.16,2051.51 ; USBC1.A12 1489.61,2062.5 USBC1.A12@1492.5,2062.5 ; USBC1.A1 1750.94,2051.58 1800.02,2002.5 v1(1802.5,2002.5) ; v1(2152.5,1764) 2152.5,1759 2169,1742.5 U8.2 ; U8.8 2474.86,1839.86 v1(2482.5,1847.5)
  Bottom Layer 1 w30: v1(2722.5,1062.5) 2722.5,1117.5 C16.1 C17.1 2719,1250 2750,1281 C15.1
  Bottom Layer 1 w50: C15.1 2755,1277.5 v1(2822.5,1277.5)
  other v1: 2842.5,136.04 3132.5,136.04 1118.78,141.04 1415.67,141.04 2792.5,262.5 3077.5,262.5 1072.5,267.5 1362.5,267.5 747.5,272.24 580,315 645,315 836.52,427.5 2842.5,482.5 3132.5,482.5 1118.78,487.5 1415.67,487.5 836.52,517.5 1072.5,683.96 1147.5,897.5 3179,972.5 2337.5,1127.5 2407.5,1127.5 2337.5,1187.5 2407.5,1187.5 2337.5,1247.5 867.5,1512.5 867.5,1577.5 1904,1597.5 867.5,1642.5 1827.5,1677.73 1907.5,1677.73 637.5,1877.5 512.5,1887.5 572.5,1887.5 668,2019 668,2079 668,2139
  other v2: 642.5,1807.5 542.5,1817.5 578,2024.5 578,2134.5
IN1: U3.29 U4.27 | length 489.2
  Top Layer 1 w10: U3.29 1836.16,981.33 1841.51,981.33 1843.15,979.69 2005.35,979.69 2071.66,1046 U4.27
IN2: U3.30 U4.25 | length 490.7
  Top Layer 1 w10: U3.30 1850.08,995.25 1855.43,995.25 1857.07,993.61 1994.16,993.61 2097.73,1097.19 U4.25
IN3: U3.31 U4.23 | length 492.2
  Top Layer 1 w10: U3.31 1864,1009.17 1869.35,1009.17 1870.99,1007.53 1982.49,1007.53 2123.32,1148.37 U4.23
KEY1: C12.1 R9.2 SW3.1 SW3.4 U3.21 | length 1362.1
  Top Layer 1 w10: SW3.1 941.61,174.51 997.5,230.39 v1(997.5,267.5) ; v1(997.5,352.5) 997.5,398.15 941.61,454.04 941.61,520.96 1005.65,585 1160,585 1342.5,767.5 v1(1407.5,767.5) ; v1(1582.5,937.5) 1582.67,937.5 1637.99,992.81 U3.21
  Bottom Layer 1 w10: v1(997.5,267.5) v1(997.5,352.5) ; v1(1407.5,767.5) 1487.5,767.5 1582.5,862.5 v1(1582.5,937.5)
KEY2: C13.1 R10.2 SW4.1 SW4.4 U3.22 | length 1133
  Top Layer 1 w10: SW4.1 1238.5,174.51 1292.5,228.51 v1(1292.5,267.5) ; v1(1292.5,352.5) 1292.5,400.04 1238.5,454.04 SW4.4 1238.5,598.5 v1(1362.5,722.5) ; v1(1617.5,887.5) 1617.5,943.83 1652.08,978.4 U3.22
  Bottom Layer 1 w10: v1(1292.5,267.5) v1(1292.5,352.5) ; v1(1362.5,722.5) 1497.5,722.5 1617.5,842.5 v1(1617.5,887.5)
KEY3: C8.1 R3.2 SW1.1 SW1.4 U3.25 | length 1512.9
  Top Layer 1 w10: U3.25 2001.14,705 2457.73,705 2641.53,521.21 2651.77,521.21 2665.33,507.64 2665.33,449.04 2722.5,391.87 v1(2722.5,347.5) ; SW1.1 2665.33,169.51 2722.5,226.67 v1(2722.5,262.5)
  Bottom Layer 1 w10: v1(2722.5,262.5) v1(2722.5,347.5)
KEY4: C9.1 R4.2 SW2.1 SW2.4 U3.26 | length 1790.6
  Top Layer 1 w10: U3.26 2008.98,725 2727.73,725 2931.53,521.21 2941.77,521.21 2955.33,507.64 2955.33,449.04 3007.5,396.87 v1(3007.5,347.5) ; SW2.1 2955.33,169.51 3007.5,221.67 v1(3007.5,262.5)
  Bottom Layer 1 w10: v1(3007.5,262.5) v1(3007.5,347.5)
LCD_DC: LCD1.5 U3.14 | length 1219.6
  Top Layer 1 w10: U3.14 1472.5,1022.03 1472.5,992.5 1492.5,972.5 1492.5,632.5 1722.5,402.5 LCD1.5
LCD_RST: LCD1.6 U3.16 | length 1247.6
  Top Layer 1 w10: v1(1457.5,892.5) 1457.5,632.5 1715.06,374.94 LCD1.6 ; v1(1522.5,1012.5) 1524.41,1014.41 1524.41,1018.26 U3.16
  Bottom Layer 1 w10: v1(1457.5,892.5) 1457.5,947.5 v1(1522.5,1012.5)
LCD_SCL: LCD1.4 U3.15 | length 1157.3
  Top Layer 1 w10: U3.15 1497.5,1019.19 1497.5,997.5 1517.5,977.5 1517.5,645.06 1732.5,430.06 LCD1.4
LCD_SDA: LCD1.3 U3.17 | length 1070.3
  Top Layer 1 w10: U3.17 1542.5,1008.51 1542.5,657.5 1742.38,457.62 LCD1.3
LED: LED2.2 U3.13 | length 283.6
  Top Layer 1 w10: LED2.2 1346.5,902.76 1427.29,983.55 1427.29,1004.66 U3.13
NetC5_1: C5.1 U1.6 | length 89.4
  Top Layer 1 w10: C5.1 C5.1@855.82,1902.5
  Top Layer 1 w20: U1.6 C5.1@855.82,1902.5
NetC5_2: C5.2 L1.1 U1.2
  other v1: 297.5,1572.5 327.5,1572.5 357.5,1572.5 297.5,1602.5 327.5,1602.5 357.5,1602.5 297.5,1632.5 327.5,1632.5 357.5,1632.5 697.5,1777.5 727.5,1777.5 757.5,1777.5 781,1902.5
NetC11_1: C11.1 R8.1 R11.2 U1.4 | length 257.6
  Top Layer 1 w10: U1.4 972.5,1740.1 R11.2 R8.1 C11.1
NetC11_2: C11.2 R6.1 R8.2 | length 147
  Top Layer 1 w10: R6.1 R8.2 C11.2
NetC14_1: C14.1 U4.3 | length 233.5
  Top Layer 1 w10: v1(2437.5,937.5) 2437.5,998.85 2432.5,1003.85 2432.5,1062.5 2441.59,1071.59 U4.3
  Bottom Layer 1 w10: v1(2437.5,937.5) 2440.21,937.5 2443.71,934 C14.1
NetC21_1: C21.1 U4.1 | length 187.9
  Top Layer 1 w10: U4.1 2534.59,1020.41 2552.59,1002.41 2552.59,992.41 v1(2572.5,972.5)
  Bottom Layer 1 w10: v1(2572.5,972.5) 2604.33,972.5 2605.28,973.45 2635.05,973.45 C21.1
NetC21_2: C21.2 U4.2 | length 182.4
  Top Layer 1 w10: U4.2 2544,1046 v1(2572.5,1017.5)
  Bottom Layer 1 w10: v1(2572.5,1017.5) 2621,1017.5 2627.5,1024 2632.5,1024 2642.5,1034 C21.2
NetC23_1: C23.1 U9.8 | length 108.2
  Top Layer 1 w10: U9.8 1800.73,1782.5 1827.5,1755.73 C23.1
NetJ1_1: J1.1 S2.3
NetJP1_3: JP1.3 R18.1 | length 90.6
  Bottom Layer 1 w10: R18.1 1117.5,1274 JP1.3
NetJP1_4: JP1.4 R19.2 | length 90.6
  Bottom Layer 1 w10: R19.2 1117.5,1551 JP1.4
NetLED1_1: LED1.1 R1.2 | length 71.8
  Top Layer 1 w10: LED1.1@814,275.74 R1.2
NetLED2_1: LED2.1 R2.2 | length 71.5
  Top Layer 1 w10: R2.2 1266,899.75 LED2.1
NetR5_1: R5.1 R7.2 U1.5 | length 383.7
  Top Layer 1 w20: U1.5 v1(917.5,1777.5)
  Bottom Layer 1 w20: R5.1 R7.2 800.78,1647.28 800.78,1672.5 812.5,1684.22 812.5,1765.78 824.22,1777.5 v1(917.5,1777.5)
  other v1: 722.5,1647.5
NetR15_1: R15.1 U4.18 | length 124.3
  Top Layer 1 w10: v1(2207.5,1237.5) 2209.41,1239.41 2209.41,1249.56 2236.17,1276.32 U4.18
  Bottom Layer 1 w10: R15.1 v1(2207.5,1237.5)
NetR16_1: R16.1 U4.16 | length 135.5
  Top Layer 1 w10: v1(2207.5,1377.5) 2209.41,1375.59 2209.41,1354.26 2236.17,1327.5 U4.16
  Bottom Layer 1 w10: R16.1 v1(2207.5,1377.5)
NetR17_1: R17.1 U4.17 | length 104.6
  Top Layer 1 w10: v1(2207.5,1302.5) 2207.8,1302.2 2260.97,1302.2 U4.17
  Bottom Layer 1 w10: R17.1 2164,1302.5 v1(2207.5,1302.5)
NetR23_2: R23.2 USBC1.B5 | length 379.5
  Top Layer 1 w10: R23.2 R23.2@1417.5,1754.99 ; R23.2@1428.25,1765.73 R23.2@1417.5,1754.99 ; USBC1.B5 1550.15,1970.86 1417.5,1838.2 R23.2@1417.5,1754.99
NetR24_2: R24.2 USBC1.A5 | length 409.7
  Top Layer 1 w10: USBC1.A5@1669.17,2059.16 USBC1.A5 1668.27,1994.22 1907.5,1754.99 R24.2
NetU3_5: U3.5 X1.1 | length 141.3
  Top Layer 1 w10: X1.1 1584.77,1370.23 1584.77,1316.73 1624.24,1277.26 U3.5
NetU3_6: U3.6 X1.3 | length 140.7
  Top Layer 1 w10: X1.3 1517.96,1303.42 1569.76,1303.42 U3.6
OUT1: JP2.1 R20.1 U5.5 | length 735.3
  Top Layer 1 w10: v1(2872.5,1116.5) 2872.5,1147.5 U5.5
  Top Layer 1 w50: v1(2872.5,1116.5) 2931.5,1057.5 3177.5,1057.5 3305,1185 3393.7,1185 JP2.1
OUT1_CS: R20.2 U4.5 U5.4 | length 561.1
  Top Layer 1 w10: U4.5 2537.22,1122.78 2537.5,1122.5 ; R20.2 2872.5,1173.09 U5.4
  Top Layer 1 w30: 2537.5,1122.5 2717.5,1122.5
  Top Layer 1 w50: 2717.5,1122.5 2801.5,1206.5 R20.2
OUT2: JP2.2 R21.1 U6.5 | length 701.7
  Top Layer 1 w10: v1(2872.5,1385.5) 2872.5,1414.09 ccw(c2869.09,1414.09) 2871.5,1416.5 U6.5
  Top Layer 1 w50: v1(2872.5,1385.5) 2925.5,1332.5 3182.5,1332.5 3229.22,1379.22 3391.07,1379.22 JP2.2
OUT2_CS: R21.2 U4.8 U6.4 | length 706.7
  Top Layer 1 w10: U4.8 2555.45,1199.55 2557.5,1197.5 ; R21.2 2872.5,1442.5 2872.91,1442.09 U6.4
  Top Layer 1 w30: 2557.5,1197.5 2572.5,1212.5 2652.5,1212.5
  Top Layer 1 w50: 2652.5,1212.5 2787.5,1347.5 2787.5,1457.93 2805.07,1475.5 R21.2
OUT3: JP2.3 R22.1 U7.5 | length 740.2
  Top Layer 1 w10: v1(2872.5,1626.5) 2872.5,1658.5 2976.53,1658.5 U7.5 U7.5@2949.98,1657.5
  Top Layer 1 w30: v1(2872.5,1626.5) R22.1@2882.5,1616.5
  Top Layer 1 w50: v1(2872.5,1626.5) 2872.5,1601.79 2901.79,1572.5 3180,1572.5 3187.5,1580 JP2.3
OUT3_CS: R22.2 U4.9 U7.4 | length 863.8
  Top Layer 1 w10: U4.9 2484.69,1226.09 2526.09,1226.09 2532.5,1232.5 ; R22.2 2872.5,1683.09 U7.4
  Top Layer 1 w30: 2532.5,1232.5 2547.5,1247.5 2594.93,1247.5 2612.5,1265.07 ; R22.2@2871.5,1717.5 R22.2
  Top Layer 1 w50: 2612.5,1265.07 2612.5,1492.5 2837.5,1717.5 R22.2@2871.5,1717.5
RST: C22.2 R12.1 S1.2 U3.7 | length 830.9
  Top Layer 1 w10: v1(1147.5,957.5) 1074.55,957.5 S1.2 v1(1072.5,964) 1072.5,969.39 1385.61,1282.5 1513.6,1282.5 1513.82,1282.28 1562.56,1282.28 1595.91,1248.93 U3.7
  Bottom Layer 1 w10: v1(1072.5,964) 1136.58,964 1143.08,957.5 v1(1147.5,957.5)
SWCLK: JP3.1 U3.37 | length 1755.3
  Top Layer 1 w10: U3.37 1932.9,1204.04 1970.96,1204.04 v1(1972.5,1202.5)
  Bottom Layer 1 w10: v1(1972.5,1202.5) 2107.5,1202.5 2187.5,1122.5 2187.5,1037.5 2237.5,987.5 2237.5,857.5 2337.5,757.5 3236.64,757.5 3242.5,763.36 3242.5,832.5 JP3.1
SWDIO: JP3.2 U3.34 | length 1485.4
  Top Layer 1 w10: U3.34 1880.85,1076.33 1919.68,1037.5 v1(1967.5,1037.5) ; v1(2077.5,1007.5) 2167.5,1007.5 2202.5,972.5 2202.5,847.5 2242.5,807.5 3117.5,807.5 JP3.2
  Bottom Layer 1 w10: v1(1967.5,1037.5) 2047.5,1037.5 v1(2077.5,1007.5)
UART1_RX: U3.43 U9.6 | length 637.4
  Top Layer 1 w10: U9.6 1706.66,1682.5 1682.5,1658.34 1682.5,1607.5 1727.5,1562.5 1822.5,1562.5 v1(1902.5,1482.5) ; U3.43 1882.5,1320.67 v1(1882.5,1402.5)
  Bottom Layer 1 w10: v1(1882.5,1402.5) 1882.5,1462.5 v1(1902.5,1482.5)
UART1_TX: U3.42 U9.7 | length 706
  Top Layer 1 w10: U9.7 1706.66,1732.5 1662.5,1688.34 1662.5,1597.5 1717.5,1542.5 1787.5,1542.5 1912.5,1417.5 1912.5,1322.5 1838.93,1248.93 U3.42
VBUS: D1.1 USBC1.A4 USBC1.A9 USBC1.B4 USBC1.B9 | length 766.6
  Top Layer 1 w10: 1501.01,2019.41 1494.1,2012.5 v1(1492.5,2012.5) 1495.21,2012.5 1510.12,2027.42 1514.57,2027.42 1530.47,2043.32 USBC1.B4 ; 1517.75,2036.15 1517.75,2059.16 USBC1.A9 ; v1(1737.5,2007.5) v1@1735.59,2009.41 ; 1719.44,2031.68 USBC1.A4 USBC1.B9 1707.63,2043.49 1719.44,2031.68 ; 1719.44,2031.68 1735.59,2015.54 v1@1735.59,2009.41 ; 1719.44,2031.68 1719.44,2025.56 v1@1735.59,2009.41
  Bottom Layer 1 w20: v1(1492.5,2012.5) 1497.5,2017.5 1727.5,2017.5 v1(1737.5,2007.5) D1.1@1737.5,1739.68 ; D1.1 D1.1@1737.5,1739.68 ; D1.1@1742.5,1744.68 D1.1@1737.5,1739.68
VM: C3.2 C4.2 C14.2 C15.2 C16.2 C17.2 D2.2 R5.2 S2.2 U1.3 U4.4 U4.11 | length 777.2
  Top Layer 1 w10: U4.4 2510.18,1097.19 2522.95,1084.41 2535.59,1084.41 v1(2537.5,1082.5) ; U4.11 2547.5,1276.32 v1(2547.5,1277.5)
  Bottom Layer 1 w30: C14.2 2487.5,866 2522.5,901 2522.5,982.5 2502.5,1002.5 2502.5,1047.5 v1(2537.5,1082.5)
  Bottom Layer 1 w50: v1(2537.5,1082.5) 2608.57,1082.5 2643.57,1117.5 C16.2 C17.2 2646,1281 2647.5,1282.5 C15.2 2615,1277.5 v1(2547.5,1277.5)
  other v1: 667.5,1512.5 732.5,1512.5 667.5,1582.5 732.5,1582.5 637.5,1642.5
pads on no net: J1.S1 J1.S2 LCD1.1 LCD1.2 LCD1.9 S2.1 U2.4 U3.2 U3.3 U3.4 U3.18 U3.19 U3.27 U3.38 U3.39 U3.40 U3.41 U4.12 U4.13 U4.15 U4.19 U4.21 U8.5 U9.4 USBC1. USBC1.0 USBC1.A8 USBC1.B8

## Polygon pours and split planes (outlines as drawn)
GND on Top Layer 1 "Top Layer-GND" (solid, remove dead copper, pour order 16): 196.85,0 cw(c196.85,196.85) 0,196.85 0,2165.35 cw(c196.85,2165.35) 196.85,2362.2 3346.46,2362.2 cw(c3346.46,2165.35) 3543.31,2165.35 3543.31,196.85 cw(c3346.46,196.85) 3346.46,0
+3V3 on Top Layer 1 "Top Layer-3V3" (solid, remove dead copper, pour order 11): 525,465 780,465 780,325 680,325 680,370 525,370
+5 on Top Layer 1 "Top Layer-5V" (solid, remove dead copper, pour order 10): 438.75,490 438.75,475 780,475 780,590 247.5,590 247.5,1847.5 392.5,1847.5 392.5,1975 503,1975 503,2172.5 342.5,2172.5 97.5,1927.5 97.5,490
GND on Top Layer 1 "Top Layer-Power GND" (solid, remove dead copper, pour order 8): 400,1967.5 512,1967.5 512,2172.5 701.25,2172.5 1002.5,2172.5 1002.5,1797.5 897.5,1797.5 897.5,1937.5 742.5,1937.5 742.5,1867.5 812.5,1867.5 812.5,1797.5 667.5,1797.5 667.5,1762.5 400,1762.5
VM on Top Layer 1 "Top Layer-VM" (solid, remove dead copper, pour order 2): 812.5,1752.5 812.5,1697.5 762.5,1697.5 762.5,1487.5 512.5,1487.5 462.5,1437.5 462.5,1292.5 257.5,1292.5 257.5,1442.5 362.5,1547.5 427.5,1547.5 487.5,1607.5 487.5,1752.5
NetC5_2 on Top Layer 1 "Top Layer-SW" (solid, remove dead copper, pour order 7): 812.5,1762.5 682.5,1762.5 682.5,1792.5 812.5,1792.5
NetJ1_1 on Top Layer 1 "Top Layer-VM_IN" (solid, remove dead copper, pour order 12): 760,947.5 472.5,947.5 472.5,1432.5 517.5,1477.5 760,1477.5
GND on Bottom Layer 1 "Top Layer-GND" (solid, remove dead copper, pour order 17): 196.85,0 cw(c196.85,196.85) 0,196.85 0,2165.35 cw(c196.85,2165.35) 196.85,2362.2 3346.46,2362.2 cw(c3346.46,2165.35) 3543.31,2165.35 3543.31,196.85 cw(c3346.46,196.85) 3346.46,0
NetC5_2 on Bottom Layer 1 "Bottom Layer-SW" (solid, remove dead copper, pour order 9): 772.5,1882.5 817.5,1882.5 817.5,1922.5 737.5,1922.5 737.5,1792.5 277.5,1792.5 277.5,1552.5 377.5,1552.5 377.5,1762.5 772.5,1762.5
+5 on Power (split plane): 505.92,1965 506.23,1963.44 507.12,1962.12 508.44,1961.23 510,1960.92 720,1960.92 721.56,1961.23 722.88,1962.12 723.77,1963.44 724.08,1965 724.08,2008.42 1083.42,2008.42 1083.42,1952.5 1083.73,1950.94 1084.62,1949.62 1085.94,1948.73 1087.5,1948.42 3135.92,1948.42 3135.92,1826.58 2682.5,1826.58 2680.94,1826.27 2679.62,1825.38 2678.73,1824.06 2678.42,1822.5 2678.42,1556.58 1684.19,1556.58 1640.38,1600.38 1639.06,1601.27 1637.5,1601.58 1369.19,1601.58 1252.88,1717.88 1251.56,1718.77 1250,1719.08 575,1719.08 573.44,1718.77 572.12,1717.88 571.23,1716.56 570.92,1715 570.92,1606.58 20.1,1606.58 20.1,2165.35 20.1,2176.94 23.12,2199.91 29.12,2222.29 37.98,2243.7 49.57,2263.76 63.67,2282.15 80.06,2298.53 98.44,2312.64 118.51,2324.22 139.91,2333.09 162.29,2339.08 185.27,2342.11 505.92,2342.11
VM on Power (split plane): 1364.62,1594.62 1365.94,1593.73 1367.5,1593.42 1635.81,1593.42 1679.62,1549.62 1680.94,1548.73 1682.5,1548.42 2678.42,1548.42 2678.42,1046.58 2446.58,1046.58 2446.58,1387.5 2446.27,1389.06 2445.38,1390.38 2444.06,1391.27 2442.5,1391.58 2224.19,1391.58 2195.38,1420.38 2194.06,1421.27 2192.5,1421.58 1614.19,1421.58 1580.38,1455.38 1579.06,1456.27 1577.5,1456.58 1339.19,1456.58 1270.38,1525.38 1269.06,1526.27 1267.5,1526.58 962.5,1526.58 960.94,1526.27 960.28,1525.83 959.62,1525.38 909.62,1475.38 863.31,1429.08 579.08,1429.08 579.08,1710.92 1248.31,1710.92
+3V3 on Power (split plane): 3381.01,2339.08 3403.39,2333.09 3424.8,2324.22 3444.87,2312.64 3463.25,2298.53 3479.63,2282.15 3493.74,2263.76 3505.32,2243.7 3514.19,2222.29 3520.19,2199.91 3523.21,2176.94 3523.21,2165.35 3523.21,196.85 3523.21,185.27 3520.19,162.29 3514.19,139.91 3505.32,118.51 3493.74,98.44 3479.63,80.06 3463.25,63.67 3444.87,49.57 3424.8,37.98 3403.39,29.12 3381.01,23.12 3358.04,20.1 196.85,20.1 185.27,20.1 162.29,23.12 139.91,29.12 118.51,37.98 98.44,49.57 80.06,63.67 63.67,80.06 49.57,98.44 37.98,118.51 29.12,139.91 23.12,162.29 20.1,185.27 20.1,196.85 20.1,1598.42 570.92,1598.42 570.92,1425 571.23,1423.44 572.12,1422.12 573.44,1421.23 575,1420.92 865,1420.92 866.56,1421.23 867.88,1422.12 915.38,1469.62 964.19,1518.42 1265.81,1518.42 1334.62,1449.62 1335.94,1448.73 1337.5,1448.42 1575.81,1448.42 1609.62,1414.62 1610.28,1414.17 1610.94,1413.73 1612.5,1413.42 2190.81,1413.42 2219.62,1384.62 2220.94,1383.73 2222.5,1383.42 2438.42,1383.42 2438.42,1042.5 2438.73,1040.94 2439.62,1039.62 2440.94,1038.73 2442.5,1038.42 2682.5,1038.42 2684.06,1038.73 2685.38,1039.62 2686.27,1040.94 2686.58,1042.5 2686.58,1552.5 2686.58,1818.42 3140,1818.42 3141.56,1818.73 3142.88,1819.62 3143.77,1820.94 3144.08,1822.5 3144.08,1952.5 3143.77,1954.06 3142.88,1955.38 3141.56,1956.27 3140,1956.58 1091.58,1956.58 1091.58,2012.5 1091.27,2014.06 1090.38,2015.38 1089.06,2016.27 1087.5,2016.58 720,2016.58 718.44,2016.27 717.12,2015.38 716.23,2014.06 715.92,2012.5 715.92,1969.08 514.08,1969.08 514.08,2342.11 3358.04,2342.11
GND on Ground (split plane): 3381.01,2339.08 3403.39,2333.09 3424.8,2324.22 3444.87,2312.64 3463.25,2298.53 3479.63,2282.15 3493.74,2263.76 3505.32,2243.7 3514.19,2222.29 3520.19,2199.91 3523.21,2176.94 3523.21,2165.35 3523.21,196.85 3523.21,185.27 3520.19,162.29 3514.19,139.91 3505.32,118.51 3493.74,98.44 3479.63,80.06 3463.25,63.67 3444.87,49.57 3424.8,37.98 3403.39,29.12 3381.01,23.12 3358.04,20.1 196.85,20.1 185.27,20.1 162.29,23.12 139.91,29.12 118.51,37.98 98.44,49.57 80.06,63.67 63.67,80.06 49.57,98.44 37.98,118.51 29.12,139.91 23.12,162.29 20.1,185.27 20.1,196.85 20.1,2165.35 20.1,2176.94 23.12,2199.91 29.12,2222.29 37.98,2243.7 49.57,2263.76 63.67,2282.15 80.06,2298.53 98.44,2312.64 118.51,2324.22 139.91,2333.09 162.29,2339.08 185.27,2342.11 3358.04,2342.11

## Other copper
Power (plane layer: these items are gaps in the copper):